# EAGLE board tutisduino (EAGLE 5.11)
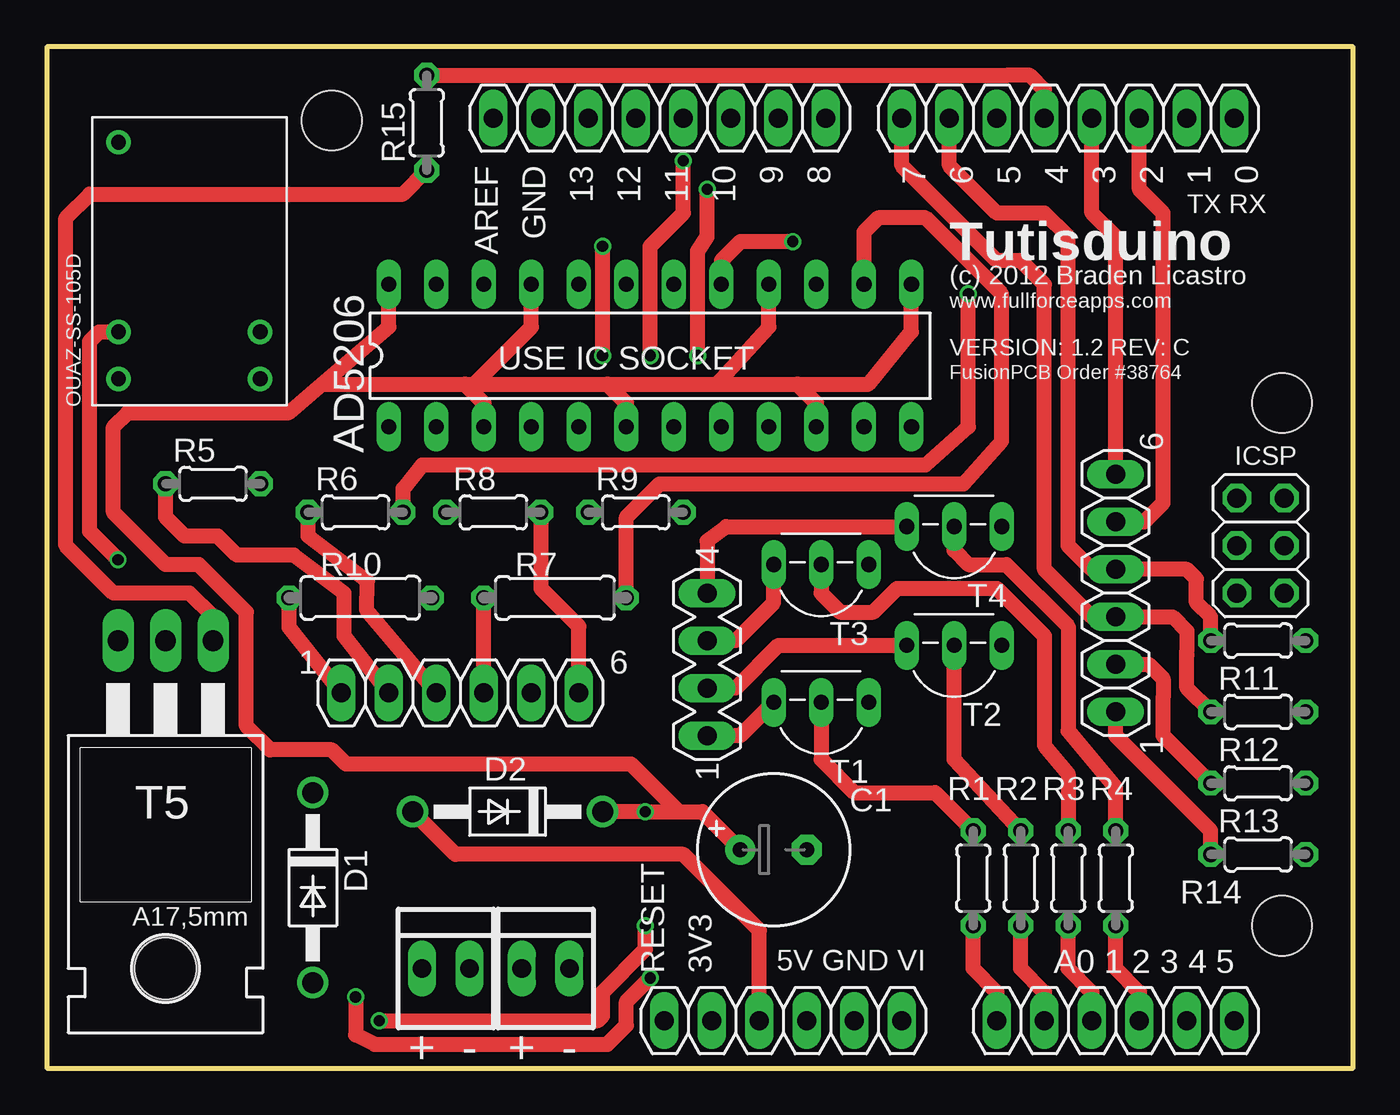
[diagram p0: board, top side]
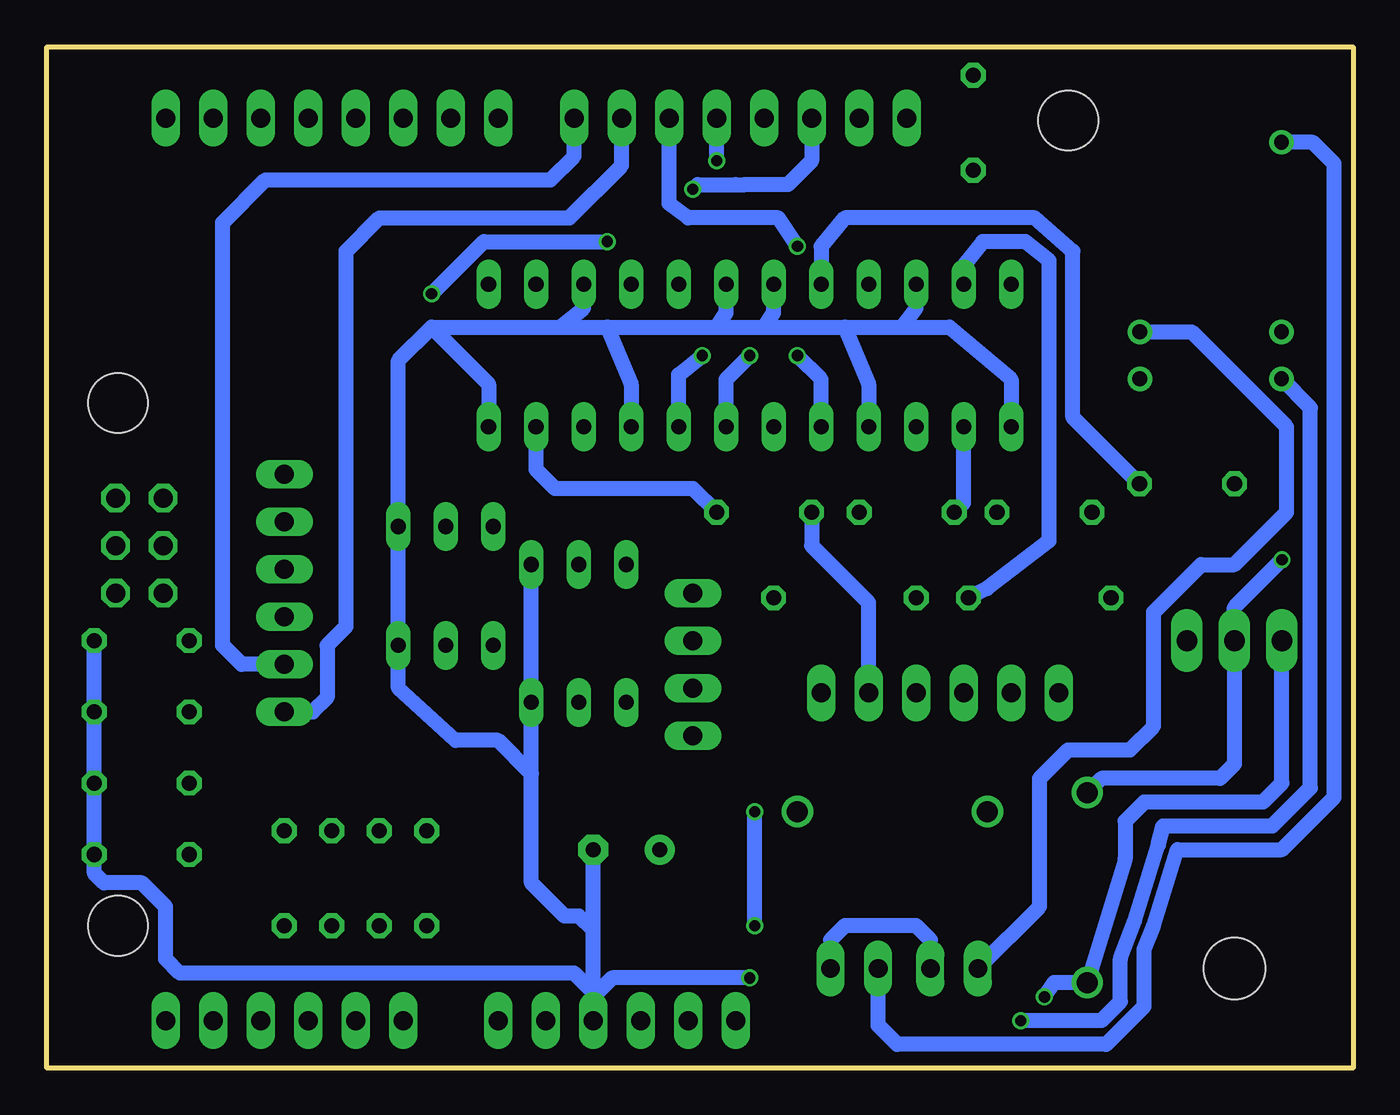
[diagram p1: board, bottom side, seen from below]

Size 69.85 x 54.61 mm. Coordinates in mm from the lower left corner, seen from the top.
Outline: 0,0 69.85,0 69.85,54.61 0,54.61 0,0
Copper layers (1*16): Top 0.035mm / dielectric 1.5mm / Bottom 0.035mm
Design rules "Fusion_eagle_rule_v1.1": minimum track width 6mil, minimum drill 12mil, track to track 6mil, track to pad 6mil, pad to pad 6mil, via to via 6mil, smd to smd 0mil, copper to edge 10mil, drill to drill 10mil, minimum pad ring 10mil, minimum via ring 6mil, stop-mask expansion 2mil, vias tented up to drill 100mil, thermal gap 10mil
Net classes: 0 default: width 0.762 mm
Holes 3.2 mm at 15.24,50.67 66.04,35.56 66.04,7.62

## Footprints (pad centres in the part's own frame; a part is rotated, then mirrored left to right if it is on the bottom)
DIL24-3 = drill 0.813 long: 1 -13.97,-3.81; 2 -11.43,-3.81; 3 -8.89,-3.81; 4 -6.35,-3.81; 5 -3.81,-3.81; 6 -1.27,-3.81; 7 1.27,-3.81; 8 3.81,-3.81; 9 6.35,-3.81; 10 8.89,-3.81; 11 11.43,-3.81; 12 13.97,-3.81; 13 13.97,3.81; 14 11.43,3.81; 15 8.89,3.81; 16 6.35,3.81; 17 3.81,3.81; 18 1.27,3.81; 19 -1.27,3.81; 20 -3.81,3.81; 21 -6.35,3.81; 22 -8.89,3.81; 23 -11.43,3.81; 24 -13.97,3.81
E3,5-8 = drill 0.813 pad 1.6 round: + -1.778,0 | drill 0.813 pad 1.6 octagon: - 1.778,0
DO41-10 = drill 1.118 round: A 5.08,0; C -5.08,0
2X03 = drill 1.016 octagon: 1 -2.54,-1.27; 2 -2.54,1.27; 3 0,-1.27; 4 0,1.27; 5 2.54,-1.27; 6 2.54,1.27
1X08 = drill 1.016 long: 1 -8.89,0; 2 -6.35,0; 3 -3.81,0; 4 -1.27,0; 5 1.27,0; 6 3.81,0; 7 6.35,0; 8 8.89,0
1X06 = drill 1.016 long: 1 -6.35,0; 2 -3.81,0; 3 -1.27,0; 4 1.27,0; 5 3.81,0; 6 6.35,0
OUAZ-SS-105D = drill 0.8 round: COMM 6.35,3.785; NC -6.299,-3.785; NO -3.785,-3.785; P1 -6.299,3.785; P2 -3.785,3.785
0204/5 = drill 0.813 octagon: 1 -2.54,0; 2 2.54,0
0207/7 = drill 0.813 octagon: 1 -3.81,0; 2 3.81,0
MA04-1 = drill 1.016 long: 1 -3.81,0; 2 -1.27,0; 3 1.27,0; 4 3.81,0
TO92-CBE = drill 0.813 long: B 0,0; C 2.54,0; E -2.54,0
TO220AH = drill 1.118 long: B -2.54,-6.35; C 0,-6.35; E 2.54,-6.35 | hole 3.302: 0,11.176
22-23-2021 = drill 1 long: 1 -1.27,0; 2 1.27,0

## Placement (x,y rotation side)
AD5206  [DIL24-3]  32.26,38.1 0 top
C1  [E3,5-8]  38.86,11.68 0 top
D1  1N4004  [DO41-10]  14.22,9.65 270 top
D2  1N4004  [DO41-10]  24.64,13.72 180 top
E$3  [2X03]  64.9,27.94 90 top
J1  [1X08]  32.77,50.8 0 top
J2  [1X06]  57.15,2.54 0 top
J3  [1X08]  54.61,50.8 0 top
LEDPWR  LED PWR  [1X06]  22.1,20.07 0 top
OUAZ-SS-105D  [OUAZ-SS-105D]  7.62,43.15 90 top
POWER  [1X06]  39.37,2.54 0 top
R1  1k  [0204/5]  49.53,10.16 270 top
R2  1k  [0204/5]  52.07,10.16 270 top
R3  1k  [0204/5]  54.61,10.16 270 top
R4  1k  [0204/5]  57.15,10.16 270 top
R5  100  [0204/5]  8.89,31.24 0 top
R6  100  [0204/5]  16.51,29.72 0 top
R7  150  [0207/7]  27.18,25.15 0 top
R8  100  [0204/5]  23.88,29.72 0 top
R9  100  [0204/5]  31.5,29.72 0 top
R10  150  [0207/7]  16.76,25.15 0 top
R11  1k  [0204/5]  64.77,22.86 0 top
R12  1k  [0204/5]  64.77,19.05 0 top
R13  1k  [0204/5]  64.77,15.24 0 top
R14  1k  [0204/5]  64.77,11.43 0 top
R15  560  [0204/5]  20.32,50.55 90 top
SV2  LED-GND  [MA04-1]  35.31,21.59 90 top
SWITCHES  SWITCHES  [1X06]  57.15,25.4 270 top
T1  2N2222  [TO92-CBE]  41.4,19.56 180 top
T2  2N2222  [TO92-CBE]  48.51,22.61 180 top
T3  2N2222  [TO92-CBE]  41.4,26.92 180 top
T4  2N2222  [TO92-CBE]  48.51,28.96 180 top
T5  TIP120  [TO220AH]  6.35,16.51 180 top
X1  Strike  [22-23-2021]  21.34,5.33 0 top
X3  12v In  [22-23-2021]  26.67,5.33 0 top

## Library data of the parts
AD5206 = ic-package
C1 R1-R15 = rcl
D1 D2 = diode
E$3 J1-J3 LEDPWR POWER SWITCHES = pinhead
OUAZ-SS-105D = Custom Parts
SV2 = con-lstb; OC_FARNELL: unknown; OC_NEWARK: unknown
T1-T4 = transistor-npn
T5 = transistor-power
X1 X3 = con-molex; MF: MOLEX; MPN: 22-23-2021; OC_FARNELL: 1462926; OC_NEWARK: 25C3832

## Nets
N$2: R4.1 T4.B
N$3: OUAZ-SS-105D.NO X1.1
N$12: R3.1 T3.B
N$13: R2.1 T2.B
N$14: R1.1 T1.B
N$15: AD5206.5 J1.6
N$16: AD5206.7 J1.5
S$1: J3.2 R11.1 SWITCHES.3
S$2: J3.1 R12.1 SWITCHES.4
S$3: J1.8 R13.1 SWITCHES.5
S$4: J1.7 R14.1 SWITCHES.6
S$5: J3.5 SWITCHES.1
S$6: J3.6 SWITCHES.2
S$7: AD5206.1 AD5206.4 AD5206.9 AD5206.12 AD5206.15 AD5206.18 AD5206.19 AD5206.22 C1.- D1.A POWER.4 R11.2 R12.2 R13.2 R14.2 T1.E T2.E T3.E T4.E T5.E
S$8: X1.2 X3.2
S$9: R15.1 T5.B
S$10: OUAZ-SS-105D.COMM X3.1
S$11: D2.A POWER.3
S$12: AD5206.3 AD5206.6 AD5206.10 AD5206.13 AD5206.16 AD5206.21 AD5206.24 C1.+ D2.C OUAZ-SS-105D.P1
S$13: D1.C OUAZ-SS-105D.P2 T5.C
S$14: J3.4 R15.2
S$15: SV2.1 T1.C
S$16: J2.1 R1.2
S$17: J2.2 R2.2
S$18: J2.3 R3.2
S$19: J2.4 R4.2
S$20: SV2.4 T4.C
S$21: SV2.3 T3.C
S$22: SV2.2 T2.C
S$24: AD5206.8 J1.3
S$25: AD5206.23 R10.2
S$26: LEDPWR.1 R10.1
S$27: LEDPWR.4 R7.1
S$28: LEDPWR.2 R5.1
S$29: LEDPWR.3 R6.1
S$30: LEDPWR.5 R9.1
S$31: LEDPWR.6 R8.2
S$32: AD5206.20 R5.2
S$33: AD5206.2 R8.1
S$34: AD5206.11 R9.2
S$35: AD5206.14 R7.2
S$36: AD5206.17 R6.2

## Tracks (layer width: path | path; a pad name or v marks a point on that pad's centre or on a via)
N$2
  Top 0.813: T4.B 48.51,27.69 49.28,26.92 51.31,26.92 54.61,23.62 54.61,18.03 57.15,14.99 R4.1
N$3
  Bottom 0.813: X1.1 16.76,8.64 16.76,15.49 15.24,17.02 11.94,17.02 10.67,18.29 10.67,24.38 8.13,26.92 6.35,26.92 3.56,29.72 3.56,34.29 8.64,39.37 OUAZ-SS-105D.NO
N$12
  Top 0.813: T3.B 41.4,25.4 42.42,24.38 44.2,24.38 45.47,25.65 50.8,25.65 53.34,23.11 53.34,17.27 54.61,15.75 R3.1
N$13
  Top 0.813: R2.1 48.51,16.51 T2.B
N$14
  Top 0.813: T1.B 41.4,16.51 43.18,14.73 47.5,14.73 R1.1
N$15  (via drill 0.6)
  Top 0.813: v29.72,38.1 v29.72,43.94
  Bottom 0.813: AD5206.5 28.45,36.83 v29.72,38.1 | v29.72,43.94 30.73,45.47 35.56,45.47 36.58,46.23 J1.6
N$16  (via drill 0.6)
  Top 0.813: v32.26,38.1 32.26,43.94 34.04,45.72 v34.04,48.51
  Bottom 0.813: AD5206.7 33.53,36.83 v32.26,38.1 | v34.04,48.51 J1.5
S$1
  Top 0.813: J3.2 48.26,48.26 50.8,45.72 53.34,45.72 54.61,44.45 54.61,27.94 55.88,26.67 SWITCHES.3 60.96,26.67 61.47,26.16 61.47,24.89 62.23,24.13 R11.1
S$2
  Top 0.813: J3.1 45.72,48.26 50.8,43.18 52.07,43.18 53.34,41.91 53.34,26.67 55.88,24.13 SWITCHES.4 60.2,24.13 60.96,23.37 60.96,22.35 60.96,22.1 60.96,20.32 R12.1
S$3
  Top 0.813: SWITCHES.5 58.93,21.59 59.69,20.83 59.69,19.81 59.69,19.56 59.69,17.78 R13.1
  Bottom 0.813: J1.8 41.66,48.77 42.93,47.5 58.17,47.5 60.45,45.21 60.45,22.61 59.44,21.59 SWITCHES.5
S$4
  Top 0.813: SWITCHES.6 57.15,17.78 62.23,12.7 R14.1
  Bottom 0.813: J1.7 39.12,48.26 41.91,45.47 52.07,45.47 53.85,43.69 53.85,23.62 54.86,22.61 54.86,19.81 55.63,19.05 SWITCHES.6
S$5
  Top 0.813: SWITCHES.1 57.15,44.45 55.88,45.72 J3.5
S$6
  Top 0.813: J3.6 58.42,46.99 59.69,45.72 59.69,31.5 59.69,30.73 59.69,30.23 58.67,29.21 SWITCHES.2
S$7  (via drill 0.6)
  Top 0.813: v32.26,4.83 30.99,3.56 30.99,2.29 29.97,1.27 17.53,1.27 16.51,1.78 v16.51,3.81
  Bottom 0.813: AD5206.1 18.29,36.83 21.59,39.62 24.13,39.62 | AD5206.22 23.37,40.64 24.13,39.62 | AD5206.4 25.91,36.58 27.18,39.62 | AD5206.19 30.99,40.39 31.5,39.62 | 27.18,39.62 24.13,39.62 | AD5206.18 33.53,40.39 34.04,39.62 | 31.5,39.62 27.18,39.62 | AD5206.9 38.61,36.58 39.88,39.62 | 34.04,39.62 31.5,39.62 | AD5206.15 41.15,40.64 42.42,39.62 | 39.88,39.62 34.04,39.62 | AD5206.12 46.23,36.58 49.28,39.62 | 42.42,39.62 39.88,39.62 | 49.28,39.62 42.42,39.62 | 49.28,39.62 51.05,37.85 T4.E T2.E 51.05,20.32 48.01,17.53 45.72,17.53 43.94,15.75 | R11.2 R12.2 R13.2 R14.2 67.31,10.41 66.8,9.91 64.77,9.91 63.5,8.64 63.5,5.84 62.74,5.08 41.66,5.08 40.64,4.06 | T3.E T1.E 43.94,15.75 | 43.94,15.75 43.94,9.91 42.16,8.13 41.4,8.13 40.64,7.37 | 40.64,7.37 C1.- | 40.64,4.06 40.64,7.37 | 40.64,3.81 40.64,4.06 | 40.64,3.81 POWER.4 | 40.64,3.81 39.62,4.83 v32.26,4.83 | v16.51,3.81 16,4.57 D1.A 12.19,11.18 12.19,13.21 11.18,14.22 4.83,14.22 3.81,15.24 T5.E
S$8
  Bottom 0.813: X1.2 22.61,6.86 23.37,7.62 27.18,7.62 27.94,6.86 X3.2
S$9
  Top 0.813: T5.B 8.89,24.13 7.62,25.4 3.56,25.4 1.02,27.94 1.02,45.47 2.29,46.74 19.05,46.74 R15.1
S$10
  Bottom 0.813: OUAZ-SS-105D.COMM 2.16,49.51 1.02,48.36 1.02,14.48 3.81,11.68 9.4,11.68 10.67,7.62 11.18,6.35 11.18,3.3 13.21,1.27 24.38,1.27 25.4,2.29 X3.1
S$11
  Top 0.813: POWER.3 38.1,7.37 34.04,11.43 21.84,11.43 D2.A
S$12  (via drill 0.6)
  Top 0.813: AD5206.13 46.23,39.37 43.94,36.58 40.13,36.58 | AD5206.10 41.15,35.56 40.13,36.58 | AD5206.16 38.61,39.62 35.81,36.58 | AD5206.6 30.99,35.56 29.97,36.58 | 35.81,36.58 40.13,36.58 | AD5206.21 25.91,39.62 22.86,36.58 | 29.97,36.58 35.81,36.58 | AD5206.3 23.37,35.56 22.35,36.58 | 22.86,36.58 29.97,36.58 | AD5206.24 18.29,39.62 14.73,36.58 | 22.35,36.58 22.86,36.58 | 14.73,36.58 22.35,36.58 | 14.73,36.58 12.95,35.05 4.32,35.05 3.56,34.29 3.56,29.72 6.35,26.92 8.13,26.92 10.67,24.38 10.67,18.29 11.94,17.02 15.24,17.02 16,16.26 31.24,16.26 33.78,13.72 | C1.+ 35.05,13.72 33.78,13.72 | D2.C v32,13.72 33.78,13.72 | v32,7.62 32,6.35 29.72,4.06 29.72,2.79 29.46,2.54 v17.78,2.54
  Bottom 0.813: v32,7.62 v32,13.72 | v17.78,2.54 13.46,2.54 12.45,3.56 12.45,5.84 11.68,7.87 10.41,11.94 10.16,12.95 4.32,12.95 2.29,14.99 2.29,35.31 OUAZ-SS-105D.P1
S$13  (via drill 0.6)
  Top 0.813: v3.81,27.18 2.29,28.7 2.29,38.86 2.79,39.37 OUAZ-SS-105D.P2
  Bottom 0.813: D1.C 13.46,15.49 7.11,15.49 6.6,16 6.35,16.26 T5.C 6.35,24.64 v3.81,27.18
S$14
  Top 0.813: J3.4 53.34,52.32 52.58,53.09 51.31,53.09 50.04,53.09 R15.2
S$15
  Top 0.813: T1.C 37.08,17.78 SV2.1
S$16
  Top 0.813: J2.1 50.8,4.06 49.53,5.33 R1.2
S$17
  Top 0.813: J2.2 53.34,4.06 52.07,5.33 R2.2
S$18
  Top 0.813: J2.3 55.88,4.06 54.61,5.33 R3.2
S$19
  Top 0.813: J2.4 58.42,4.06 57.15,5.33 R4.2
S$20
  Top 0.813: T4.C 36.32,28.96 35.31,28.19 SV2.4
S$21
  Top 0.813: T3.C 38.86,24.89 36.83,22.86 SV2.3
S$22
  Top 0.813: T2.C 39.12,22.61 36.83,20.32 SV2.2
S$24  (via drill 0.6)
  Top 0.813: v35.31,46.99 35.31,44.45 34.8,43.69 v34.8,38.1
  Bottom 0.813: v35.31,46.99 35.05,47.24 33.02,47.24 32.51,47.24 30.23,47.24 28.96,48.51 J1.3 | v34.8,38.1 36.07,37.08 AD5206.8
S$25
  Bottom 0.813: AD5206.23 20.83,42.93 19.81,44.2 17.53,44.2 16.26,43.18 16.26,28.19 19.56,25.65 R10.2
S$26
  Top 0.813: LEDPWR.1 12.95,23.57 R10.1
S$27
  Top 0.813: LEDPWR.4 R7.1
S$28
  Top 0.813: LEDPWR.2 15.9,23.11 15.9,25.4 13.21,27.43 10.16,27.43 9.14,28.45 7.37,28.45 6.35,29.46 R5.1
S$29
  Top 0.813: LEDPWR.3 17.12,24.46 17.14,26.04 13.97,28.45 R6.1
S$30
  Bottom 0.813: LEDPWR.5 25.91,24.89 27.94,26.92 28.45,27.43 28.96,27.94 R9.1
S$31
  Top 0.813: LEDPWR.6 28.45,23.62 26.42,25.65 R8.2
S$32
  Bottom 0.813: R5.2 14.99,34.8 14.99,43.69 17.02,45.47 27.18,45.47 28.45,43.94 AD5206.20
S$33
  Bottom 0.813: R8.1 20.83,30.23 AD5206.2
S$34
  Bottom 0.813: R9.2 35.31,30.99 42.67,30.99 43.69,32 AD5206.11
S$35
  Top 0.813: R7.2 30.99,29.46 32.77,31.24 49.02,31.24 51.05,33.53 51.05,41.4 46.99,45.47 44.45,45.47 43.69,44.7 AD5206.14
S$36  (via drill 0.6)
  Top 0.813: v49.28,41.4 49.28,34.29 46.99,32.26 20.07,32.26 19.05,30.99 R6.2 | v39.88,44.2 37.08,44.2 36.07,43.18 AD5206.17
  Bottom 0.813: v49.28,41.4 46.48,44.2 v39.88,44.2

## Text on the board
tPlace: Tutisduino | (c) 2012 Braden Licastro | www.fullforceapps.com | VERSION: 1.2 REV: C | USE IC SOCKET | FusionPCB Order #38764 | 6 | ICSP | 1 | 6 | 1 | + - | + -
tNames: AREF | GND | 13 | 12 | 11 | 10 | 9 | 8 | 7 | 6 | 5 | 4 | 3 | 2 | 1 | 0 | TX RX | 5V GND VI | A0 1 2 3 4 5 | RESET | 3V3